# Altium PCB new - 备份_具有准确的打孔.PcbDoc
Units mil, origin at the board's own origin, x right, y up, seen from the top; angles counter-clockwise.
Board outline 4410 x 3685.04 mil, 2 copper layers (Top Layer, Bottom Layer); 82 components, 214 nets, 665 pads, 2 vias.
Unrouted connection lines stored in the file: 383.
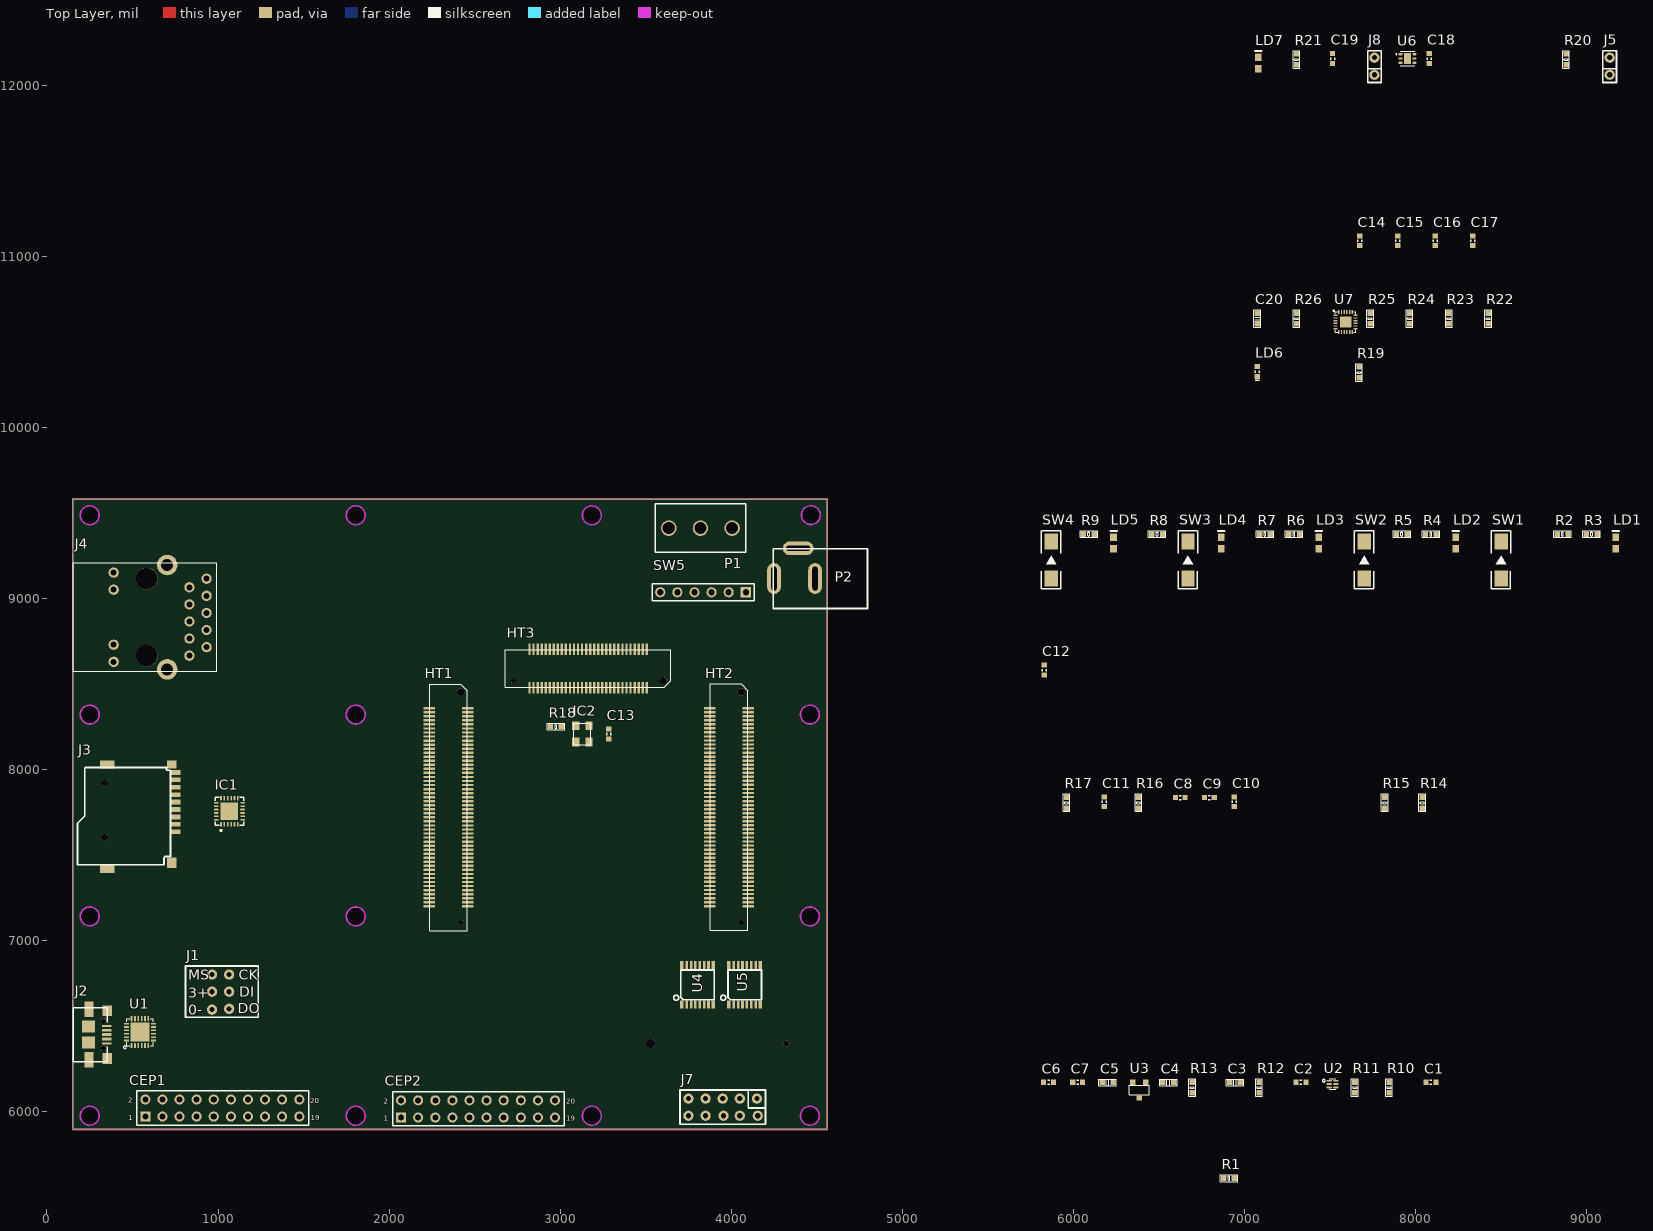
[diagram p0: Top Layer view]
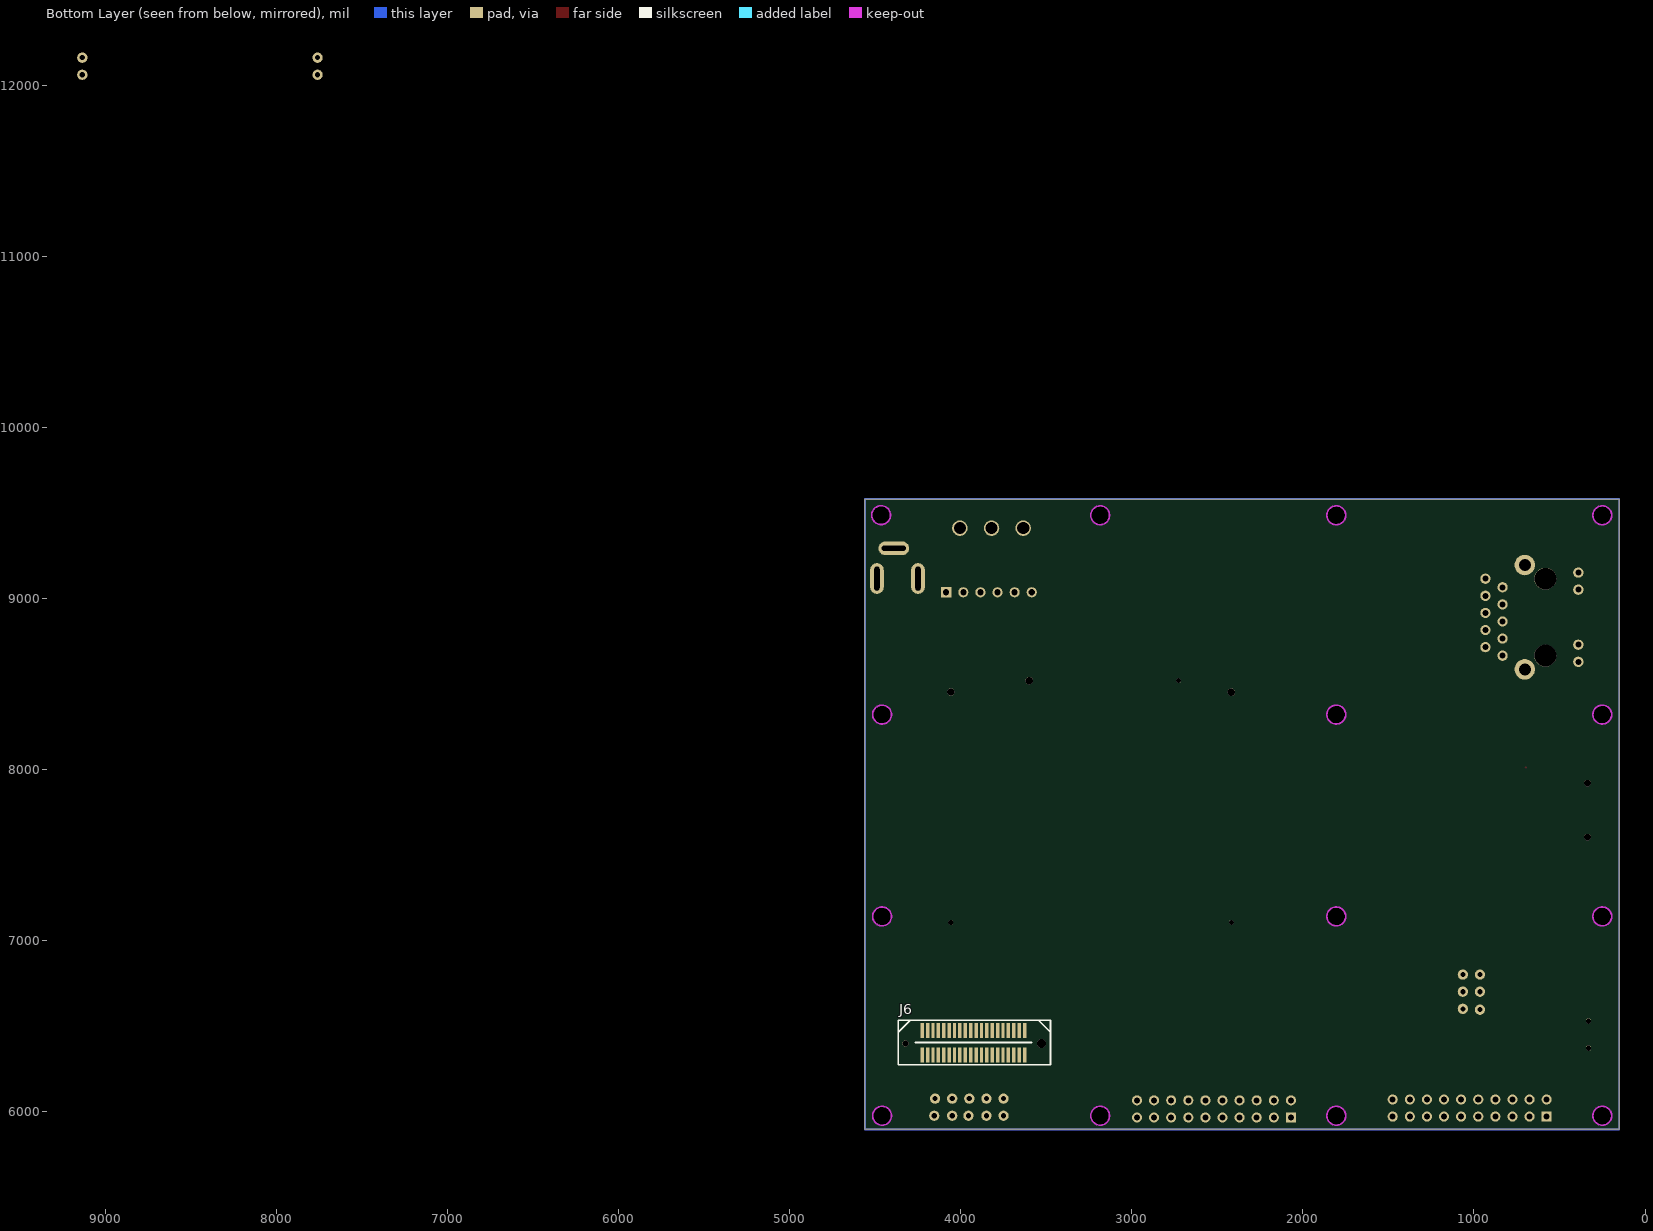
[diagram p1: Bottom Layer view, seen from below]

## Layer stack, top to bottom
Top Solder: solder mask 0.4, Solder Resist, Dk 3.5
Top Layer: signal copper 1.4
Dielectric 1: dielectric 12.6, FR-4, Dk 4.8
Bottom Layer: signal copper 1.4
Bottom Solder: solder mask 0.4, Solder Resist, Dk 3.5

## Board outline
150,5895 4560,5895 4560,9580.04 4559.45,9580 150,9580
cut-out: 1860.12,8320 cw(c1805,8320) 1805,8264.88 cw(c1805,8320) 1749.88,8320 cw(c1805,8320) 1805,8375.12 cw(c1805,8320)
cut-out: 1860.12,7140 cw(c1805,7140) 1805,7084.88 cw(c1805,7140) 1749.88,7140 cw(c1805,7140) 1805,7195.12 cw(c1805,7140)
cut-out: 305.12,9485 cw(c250,9485) 250,9429.88 cw(c250,9485) 194.88,9485 cw(c250,9485) 250,9540.12 cw(c250,9485)
cut-out: 305.12,5975 cw(c250,5975) 250,5919.88 cw(c250,5975) 194.88,5975 cw(c250,5975) 250,6030.12 cw(c250,5975)
cut-out: 305.12,7140 cw(c250,7140) 250,7084.88 cw(c250,7140) 194.88,7140 cw(c250,7140) 250,7195.12 cw(c250,7140)
cut-out: 305.12,8320 cw(c250,8320) 250,8264.88 cw(c250,8320) 194.88,8320 cw(c250,8320) 250,8375.12 cw(c250,8320)
cut-out: 1860.12,5975 cw(c1805,5975) 1805,5919.88 cw(c1805,5975) 1749.88,5975 cw(c1805,5975) 1805,6030.12 cw(c1805,5975)
cut-out: 1860.12,9485 cw(c1805,9485) 1805,9429.88 cw(c1805,9485) 1749.88,9485 cw(c1805,9485) 1805,9540.12 cw(c1805,9485)
cut-out: 3240.12,5975 cw(c3185,5975) 3185,5919.88 cw(c3185,5975) 3129.88,5975 cw(c3185,5975) 3185,6030.12 cw(c3185,5975)
cut-out: 3240.12,9485 cw(c3185,9485) 3185,9429.88 cw(c3185,9485) 3129.88,9485 cw(c3185,9485) 3185,9540.12 cw(c3185,9485)
cut-out: 4515.12,5975 cw(c4460,5975) 4460,5919.88 cw(c4460,5975) 4404.88,5975 cw(c4460,5975) 4460,6030.12 cw(c4460,5975)
cut-out: 4515.12,7140 cw(c4460,7140) 4460,7084.88 cw(c4460,7140) 4404.88,7140 cw(c4460,7140) 4460,7195.12 cw(c4460,7140)
cut-out: 4515.12,8320 cw(c4460,8320) 4460,8264.88 cw(c4460,8320) 4404.88,8320 cw(c4460,8320) 4460,8375.12 cw(c4460,8320)
cut-out: 4520.74,9485.83 cw(c4465.62,9485.83) 4465.62,9430.71 cw(c4465.62,9485.83) 4410.5,9485.83 cw(c4465.62,9485.83) 4465.62,9540.95 cw(c4465.62,9485.83)

## Design rules (kind name [scope] priority, off if disabled: settings)
Clearance [All] p1: gap=10 ignorepadtopadclearanceinfootprint=FALSE except(0: Arc-Hole Track-Hole SMDPad-Hole THPad-Hole Via-Hole Fill-Hole Poly-Hole Region-Hole Text-Hole)
DiffPairsRouting [All] p1: maxlimit=10 minlimit=10 mostfreqgap=10 toplayer_minwidth=15 toplayer_maxwidth=15 toplayer_prefwidth=15 bottomlayer_minwidth=15 bottomlayer_maxwidth=15 bottomlayer_prefwidth=15 maxuncoupledlength=500
PolygonConnect [All] p1: connectstyle=Relief reliefconductorwidth=10 reliefentries=4 polygonreliefangle="90 Angle" airgapwidth=10
RoutingVias [All] p1: holewidth=28 width=50 viastyle="Through Hole" minholewidth=28 minwidth=50 maxholewidth=28 maxwidth=50
SolderMaskExpansion [All] p1: expansion=4 istentingtop=FALSE
Width [All] p1: maxlimit=10 minlimit=10 preferedwidth=10
29 further rules are at their usual default settings.

## Classes and differential pairs
component class MPU9250: C20 R22 R23 R24 R25 R26 U7
component class Sheet2: C18 C19 J5 J6 J7 J8 LD7 R20 R21 U6
component class Sheet1: C14 C15 C16 C17 U4 U5
component class 15_PMU: LD6 P2 R19 SW5
component class 13_CEP: CEP1 CEP2
component class 12_PLCLK_100M: C13 IC2 R18
component class 11_BTN_LED_GPIO: LD1 LD2 LD3 LD4 LD5 P1 R2 R3 R4 R5 R6 R7 R8 R9 SW1 SW2 SW3 SW4
component class 07_PS_ETH_RJ45: C12 J4
component class 06_TF_CARD: C8 C9 C10 C11 IC1 J3 R14 R15 R16 R17
component class 05_USB_JTAG: J1
component class 03_UART_232: C1 C2 C3 C4 C5 C6 C7 J2 R10 R11 R12 R13 U1 U2 U3
component class 02_connector: HT1 HT2 HT3 R1
differential pair ETH-TD3: +ETH-TD3_P -ETH-TD3_N
differential pair ETH-TD2: +ETH-TD2_P -ETH-TD2_N
differential pair ETH-TD1: +ETH-TD1_P -ETH-TD1_N
differential pair ETH-TD0: +ETH-TD0_P -ETH-TD0_N
differential pair B35_L22: +B35_L22_P -B35_L22_N
differential pair B35_L20: +B35_L20_P -B35_L20_N
differential pair B35_L18: +B35_L18_P -B35_L18_N
differential pair B35_L17: +B35_L17_P -B35_L17_N
differential pair B35_L16: +B35_L16_P -B35_L16_N
differential pair B35_L15: +B35_L15_P -B35_L15_N
differential pair B35_L14: +B35_L14_P -B35_L14_N
differential pair B35_L11: +B35_L11_P -B35_L11_N
differential pair B35_L6: +B35_L6_P -B35_L6_N
differential pair B35_L5: +B35_L5_P -B35_L5_N
differential pair B35_L4: +B35_L4_P -B35_L4_N
differential pair B35_L3: +B35_L3_P -B35_L3_N
differential pair B35_L2: +B35_L2_P -B35_L2_N
differential pair B34_L24: +B34_L24_P -B34_L24_N
differential pair B34_L23: +B34_L23_P -B34_L23_N
differential pair B34_L22: +B34_L22_P -B34_L22_N
differential pair B34_L21: +B34_L21_P -B34_L21_N
differential pair B34_L20: +B34_L20_P -B34_L20_N
differential pair B34_L19: +B34_L19_P -B34_L19_N
differential pair B34_L18: +B34_L18_P -B34_L18_N
differential pair B34_L17: +B34_L17_P -B34_L17_N
differential pair B34_L16: +B34_L16_P -B34_L16_N
differential pair B34_L15: +B34_L15_P -B34_L15_N
differential pair B34_L14: +B34_L14_P -B34_L14_N
differential pair B34_L13: +B34_L13_P -B34_L13_N
differential pair B34_L12: +B34_L12_P -B34_L12_N
differential pair B34_L11: +B34_L11_P -B34_L11_N
differential pair B34_L10: +B34_L10_P -B34_L10_N
differential pair B34_L9: +B34_L9_P -B34_L9_N
differential pair B34_L8: +B34_L8_P -B34_L8_N
differential pair B34_L7: +B34_L7_P -B34_L7_N
differential pair B34_L6: +B34_L6_P -B34_L6_N
differential pair B34_L5: +B34_L5_P -B34_L5_N
differential pair B34_L4: +B34_L4_P -B34_L4_N
differential pair B34_L3: +B34_L3_P -B34_L3_N
differential pair B34_L2: +B34_L2_P -B34_L2_N

## Components (designator, comment, footprint, x,y, rotation, side; value= is the part's Value field where it differs from the comment)
C1 "10uf" CAP0603 8090,6170 r0 top
C2 "10uf" CAP0603 7330,6170 r0 top
C3 "100nF" C0603 6945,6170 r0 top
C4 "4.7uF" C0603 6555,6170 r0 top
C5 "100nF" C0603 6200,6170 r0 top
C6 "2.2uf" CAP0603 5855,6170 r0 top
C7 "10uf" CAP0603 6025,6170 r0 top
C8 "0.1uf" CAP0603 6625,7835 r0 top value=0.1uF
C9 "0.1uf" CAP0603 6795,7835 r0 top value=0.1uF
C10 "0.1uf" CAP0603 6940,7810 r90 top value=0.1uF
C11 "10uf/6V3" CAP0603 6180,7810 r90 top value=4.7uF
C12 "0.1uf" CAP0603 5830,8580 r90 top
C13 "0.1uf" CAP0603 3285,8206.46 r90 top value=10nF
C14 "1uf/6V3" CAP0603 7675,11090 r90 top value=4.7uF
C15 "1uf/6V3" CAP0603 7895,11090 r90 top value=4.7uF
C16 "1uf/6V3" CAP0603 8115,11090 r90 top value=4.7uF
C17 "1uf/6V3" CAP0603 8335,11090 r90 top value=4.7uF
C18 "1uf/6V3" CAP0603 8080,12155 r90 top value=4.7uF
C19 "1uf/6V3" CAP0603 7515,12155 r90 top value=4.7uF
C20 "100nF" C0603 7075,10635 r90 top
CEP1 "HEADER20" HEADER10X2X2.5 575,5970 r0 top
CEP2 "HEADER20" HEADER10X2X2.5 2070,5965 r0 top
HT1 "FX8-100S-SV" FX8-100S-SV92 2401.09,8326.14 r0 top
HT2 "FX8-100S-SV" FX8-100S-SV92 4041.49,8326.79 r0 top
HT3 "FX8-60S-SV" FX8-60S-SV92 3505.87,8701.58 r180 top
IC1 "TXS02612RTWR" QFN24 1066.77,7754.84 r90 top
IC2 "100MHZ" 3225 3129.37,8207.24 r90 top value=26MHz
J1 "JTAG" 2*3P 1115,6850 r270 top
J2 "Micro_USB2.0_DIP1" MicroUsb 245.8,6449.68 r0 top
J3 "SDK" TF_K 750,7635.16 r180 top
J4 "HY911130A" HY911130A 582.91,8889.17 r270 top
J5 "2P" 2P 9135,12060 r90 top
J6 "radar" BTB_40P_0.8_G 3970.43,6503.31 r180 bottom
J7 "ZERO_O" 2*5P 3750,6075 r0 top
J8 "2P" 2P 7760,12060 r90 top
LD1 "LED" 0603D 9170,9290 r90 top
LD2 "LED" 0603D 8235,9290 r90 top
LD3 "LED" 0603D 7435,9290 r90 top
LD4 "LED" 0603D 6865,9290 r90 top
LD5 "LED" 0603D 6235,9290 r90 top
LD6 "LED" D0603 7075,10325 r90 top value=RED
LD7 "LED" 0603D 7080,12095 r90 top
P1 "HEADER6" HEADER1X6 4085,9035 r180 top
P2 "DC" DC5.0 4415,9198 r0 top
R1 "0R" R0603 6910,5610 r0 top value=390
R2 "20k" R0603 8860,9375 r0 top
R3 "2.2k" R0603 9030,9375 r0 top
R4 "2.2k" R0603 8090,9375 r0 top
R5 "20k" R0603 7920,9375 r0 top
R6 "2.2k" R0603 7290,9375 r0 top
R7 "20k" R0603 7120,9375 r0 top
R8 "2.2k" R0603 6490,9375 r0 top
R9 "2.2k" R0603 6090,9375 r0 top
R10 "100R" R0603 7845,6140 r90 top
R11 "100R" R0603 7645,6140 r90 top
R12 "10K" R0603 7085,6140 r90 top
R13 "10K" R0603 6695,6140 r90 top
R14 "150R" R0603 8040,7805 r90 top value=150
R15 "49.9" R0603 7820,7805 r90 top
R16 "4.7K" R0603 6380,7805 r90 top
R17 "4.7K" R0603 5960,7805 r90 top
R18 "20R" R0603 2975,8250 r0 top
R19 "2K2" R0603 7670,10320 r90 top value=390
R20 "0R" R0603 8880,12150 r90 top value=390
R21 "4.7K" R0603 7305,12150 r90 top
R22 "10K" R0603 8425,10635 r90 top
R23 "10K" R0603 8195,10635 r90 top
R24 "10K" R0603 7965,10635 r90 top
R25 "10K" R0603 7735,10635 r90 top
R26 "10K" R0603 7305,10635 r90 top
SW1 "SW-1" SW-3X9 8500,9115 r90 top
SW2 "SW-1" SW-3X9 7700,9115 r90 top
SW3 "SW-1" SW-3X9 6670,9115 r90 top
SW4 "SW-1" SW-3X9 5870,9115 r90 top
SW5 "SW123" "SW1-2-3 -B" 3634.92,9410 r0 top
U1 "CP2104" QFN24_50P4X4X1 543.74,6464.21 r90 top
U2 "RCLAMP0522P" SLP1610P4_6 7515,6160 r0 top
U3 "XC6206P182MR" SOT23 6385,6125 r0 top
U4 "ADS7853IPWR" TSSOP16-0.65-5X4.4MM 3785,6740 r0 top
U5 "ADS7853IPWR" TSSOP16-0.65-5X4.4MM 4060,6740 r0 top
U6 "LP5912-3.3" WSON-6_L2.0-W2.0-P0.65-TL-EP -10040,25650 r0 top
U7 "MPU9250" MPU9250 7590,10615 r0 top

## Footprints (in the part's own frame and the unit in brackets; to place one, negate y for a bottom-side part, rotate by r counter-clockwise, add the part's x,y. Pads: shape width x height; smd on the part's side, far side on the other; paste and mask are expansions set on the pad)
2*3P [mil]
  round 60 hole 30: 1(50,-50) 2(50,-150) 3(150,-50) 4(150,-150) 5(250,-50) 6(255,-150)
  silkscreen extent 0,-305 300,120
2*5P [mil]
  round 60 hole 30: 1(0,0) 2(0,-100) 3(100,0) 4(100,-100) 5(200,0) 6(205,-100) 7(300,0) 8(300,-100) 9(400,0) 10(405,-100)
  silkscreen extent -50,-150 450,50
2P [mil]
  round 60 hole 30: 1(0,0) 2(100,0)
  silkscreen extent -45,-40 140,40
0603D [mm]
  rect 1.1x1 smd: 1(0,0) 2(1.7,0)
  silkscreen extent 2.63,-0.51 2.63,0.51, body extent -0.64,-0.58 2.34,0.58, height 0.76
3225 [mm]
  rect 1.3x1.1 smd: 1(-1.2,-1) 2(1.2,-1) 3(1.2,1) 4(-1.2,1)
  silkscreen extent -1.6,-1.25 1.6,1.25
BTB_40P_0.8_G [mm]
  rect 0.5x2.22 smd: 1(-6.477,-0.762) 2(-5.677,-0.762) 3(-4.877,-0.762) 4(-4.077,-0.762) 5(-3.277,-0.762) 6(-2.477,-0.762) 7(-1.677,-0.762) 8(-0.877,-0.762) 9(-0.077,-0.762) 10(0.723,-0.762) 11(1.523,-0.762) 12(2.323,-0.762) 13(3.123,-0.762) 14(3.923,-0.762) 15(4.723,-0.762) 16(5.523,-0.762) 17(6.323,-0.762) 18(7.123,-0.762) 19(7.923,-0.762) 20(8.723,-0.762) 21(8.723,-4.402) 22(7.923,-4.402) 23(7.123,-4.402) 24(6.323,-4.402) 25(5.523,-4.402) 26(4.723,-4.402) 27(3.923,-4.402) 28(3.123,-4.402) 29(2.323,-4.402) 30(1.523,-4.402) 31(0.723,-4.402) 32(-0.077,-4.402) 33(-0.877,-4.402) 34(-1.677,-4.402) 35(-2.477,-4.402) 36(-3.277,-4.402) 37(-4.077,-4.402) 38(-4.877,-4.402) 39(-5.677,-4.402) 40(-6.477,-4.402)
  round 0.9 hole 0.9 unplated: ""(-8.976,-2.692)
  round 1.3 hole 1.3 unplated: ""(11.222,-2.692)
  silkscreen extent -10.03,-5.84 12.57,0.76
C0603 [mm]
  rect 0.8x0.8 smd: 1(-0.8,0) 2(0.8,0)
  silkscreen extent -1.3,-0.5 1.3,0.5, body extent -1.3,-0.5 1.3,0.5, height 3.81
CAP0603 [mm]
  rect 0.75x0.8 smd: 1(-0.725,0) 2(0.725,0)
  silkscreen extent -0.15,-0.3 0.15,0.3, body extent -0.86,-0.46 0.86,0.46, height 0.92
D0603 [mm]
  rect 0.75x0.8 smd: A(0.725,0) K(-0.725,0)
  silkscreen extent -1.3,-0.3 0.15,0.3, body extent -0.86,-0.46 0.86,0.46, height 0.92
DC5.0 [mil]
  oval 80x180 hole 30 slot 140 at 90 deg: 1(-165.16,-83) 2(75,-83)
  oval 180x80 hole 30 slot 140 at 0 deg: 2(-23.43,94)
  silkscreen extent -170,-258 381,92
FX8-60S-SV92 [mm]
  rect 0.35x1.7 smd: A1(0,0) A2(0.6,0) A3(1.2,0) A4(1.8,0) A5(2.4,0) A6(3,0) A7(3.6,0) A8(4.2,0) A9(4.8,0) A10(5.4,0) A11(6,0) A12(6.6,0) A13(7.2,0) A14(7.8,0) A15(8.4,0) A16(9,0) A17(9.6,0) A18(10.2,0) A19(10.8,0) A20(11.4,0) A21(12,0) A22(12.6,0) A23(13.2,0) A24(13.8,0) A25(14.4,0) A26(15,0) A27(15.6,0) A28(16.2,0) A29(16.8,0) A30(17.4,0) B1(0,5.7) B2(0.6,5.7) B3(1.2,5.7) B4(1.8,5.7) B5(2.4,5.7) B6(3,5.7) B7(3.6,5.7) B8(4.2,5.7) B9(4.8,5.7) B10(5.4,5.7) B11(6,5.7) B12(6.6,5.7) B13(7.2,5.7) B14(7.8,5.7) B15(8.4,5.7) B16(9,5.7) B17(9.6,5.7) B18(10.2,5.7) B19(10.8,5.7) B20(11.4,5.7) B21(12,5.7) B22(12.6,5.7) B23(13.2,5.7) B24(13.8,5.7) B25(14.4,5.7) B26(15,5.7) B27(15.6,5.7) B28(16.2,5.7) B29(16.8,5.7) B30(17.4,5.7)
  round 1.092 hole 1.1: C1(-2.4,4.65)
  round 0.711 hole 0.75: C2(19.8,4.65)
  silkscreen extent -3.6,0.05 21.01,5.65, body extent -3.66,-0.87 21,6.63, height 3.81
FX8-100S-SV92 [mm]
  rect 1.7x0.35 smd: A1(-4.221,0.782) A2(-4.221,0.182) A3(-4.221,-0.418) A4(-4.221,-1.018) A5(-4.221,-1.618) A6(-4.221,-2.218) A7(-4.221,-2.818) A8(-4.221,-3.418) A9(-4.221,-4.018) A10(-4.221,-4.618) A11(-4.221,-5.218) A12(-4.221,-5.818) A13(-4.221,-6.418) A14(-4.221,-7.018) A15(-4.221,-7.618) A16(-4.221,-8.218) A17(-4.221,-8.818) A18(-4.221,-9.418) A19(-4.221,-10.018) A20(-4.221,-10.618) A21(-4.221,-11.218) A22(-4.221,-11.818) A23(-4.221,-12.418) A24(-4.221,-13.018) A25(-4.221,-13.618) A26(-4.221,-14.218) A27(-4.221,-14.818) A28(-4.221,-15.418) A29(-4.221,-16.018) A30(-4.221,-16.618) A31(-4.221,-17.218) A32(-4.221,-17.818) A33(-4.221,-18.418) A34(-4.221,-19.018) A35(-4.221,-19.618) A36(-4.221,-20.218) A37(-4.221,-20.818) A38(-4.221,-21.418) A39(-4.221,-22.018) A40(-4.221,-22.618) A41(-4.221,-23.218) A42(-4.221,-23.818) A43(-4.221,-24.418) A44(-4.221,-25.018) A45(-4.221,-25.618) A46(-4.221,-26.218) A47(-4.221,-26.818) A48(-4.221,-27.418) A49(-4.221,-28.018) A50(-4.221,-28.618) B1(1.479,0.782) B2(1.479,0.182) B3(1.479,-0.418) B4(1.479,-1.018) B5(1.479,-1.618) B6(1.479,-2.218) B7(1.479,-2.818) B8(1.479,-3.418) B9(1.479,-4.018) B10(1.479,-4.618) B11(1.479,-5.218) B12(1.479,-5.818) B13(1.479,-6.418) B14(1.479,-7.018) B15(1.479,-7.618) B16(1.479,-8.218) B17(1.479,-8.818) B18(1.479,-9.418) B19(1.479,-10.018) B20(1.479,-10.618) B21(1.479,-11.218) B22(1.479,-11.818) B23(1.479,-12.418) B24(1.479,-13.018) B25(1.479,-13.618) B26(1.479,-14.218) B27(1.479,-14.818) B28(1.479,-15.418) B29(1.479,-16.018) B30(1.479,-16.618) B31(1.479,-17.218) B32(1.479,-17.818) B33(1.479,-18.418) B34(1.479,-19.018) B35(1.479,-19.618) B36(1.479,-20.218) B37(1.479,-20.818) B38(1.479,-21.418) B39(1.479,-22.018) B40(1.479,-22.618) B41(1.479,-23.218) B42(1.479,-23.818) B43(1.479,-24.418) B44(1.479,-25.018) B45(1.479,-25.618) B46(1.479,-26.218) B47(1.479,-26.818) B48(1.479,-27.418) B49(1.479,-28.018) B50(1.479,-28.618)
  round 1.092 hole 1.1: C1(0.429,3.182)
  round 0.711 hole 0.75: C2(0.429,-31.018)
  silkscreen extent -4.17,-32.22 1.43,4.38, body extent -5.12,-32.32 2.38,4.48, height 3.81
HEADER1X6 [mm]
  rect 1.5x1.5 hole 0.9: 1(0,0)
  round 1.5 hole 0.9: 2(2.54,0) 3(5.08,0) 4(7.62,0) 5(10.16,0) 6(12.7,0)
  silkscreen extent -1.27,-1.27 13.92,1.27
HEADER10X2X2.5 [mm]
  rect 1.5x1.5 hole 0.9: 1(0,0)
  round 1.5 hole 0.9: 2(0,2.54) 3(2.54,0) 4(2.54,2.54) 5(5.08,0) 6(5.08,2.54) 7(7.62,0) 8(7.62,2.54) 9(10.16,0) 10(10.16,2.54) 11(12.7,0) 12(12.7,2.54) 13(15.24,0) 14(15.24,2.54) 15(17.78,0) 16(17.78,2.54) 17(20.32,0) 18(20.32,2.54) 19(22.86,0) 20(22.86,2.54)
  silkscreen extent -1.27,-1.27 24.25,3.81
HY911130A [mil]
  round 60 hole 35: 1(-225,350) 2(-175,250) 3(-125,350) 4(-75,250) 5(-25,350) 6(25,250) 7(75,350) 8(125,250) 9(175,350) 10(225,250) 11(-260.83,-192.91) 12(-160.83,-192.91) 13(160.83,-192.91) 14(260.83,-192.91)
  round 120 hole 70: 15(-304.92,120.08) 16(304.92,120.08)
  round 128 hole 128: " "(-225,0) " "(225,0)
  silkscreen extent -317,-430 317,409, body extent -317,-430 317,409, height 150
MicroUsb [mm]
  round 0.8 hole 0.8: 0(2.144,-2.032) 0(2.15,2)
  rect 1.4x0.305 smd: 1(2.647,1.293) 5(2.647,-1.307)
  rect 1.4x0.4 smd: 2(2.647,0.643) 3(2.647,-0.007) 4(2.647,-0.657)
  rect 1.4x1.6 smd: M1(2.697,3.531) M2(2.697,-3.556)
  rect 1.3x2.3 smd: S1(-0.003,3.743) S4(-0.003,-3.757)
  rect 1.9x1.8 smd: S2(-0.092,1.168) S3(-0.092,-1.168)
  silkscreen extent -2.3,-4.01 2.7,3.99, body extent -2.37,-3.74 2.63,4.26, height 2
MPU9250 [mm]
  rect 0.6x0.2 smd: 1(-1.472,1) 2(-1.472,0.6) 3(-1.472,0.2) 4(-1.472,-0.2) 5(-1.472,-0.6) 6(-1.472,-1) 13(1.528,-1) 14(1.528,-0.6) 15(1.528,-0.2) 16(1.528,0.2) 17(1.528,0.6) 18(1.528,1)
  rect 0.2x0.6 smd: 7(-0.972,-1.5) 8(-0.572,-1.5) 9(-0.172,-1.5) 10(0.228,-1.5) 11(0.628,-1.5) 12(1.028,-1.5) 19(1.028,1.5) 20(0.628,1.5) 21(0.228,1.5) 22(-0.172,1.5) 23(-0.572,1.5) 24(-0.972,1.5)
  rect 1.7x1.7 smd: 25(0.026,-0.003)
  silkscreen extent -1.83,-1.5 1.53,1.76
QFN24 [mm]
  oval 0.7x0.25 smd: 1(-1.95,1.25) 2(-1.95,0.75) 3(-1.95,0.25) 4(-1.95,-0.25) 5(-1.95,-0.75) 6(-1.95,-1.25) 13(1.95,-1.25) 14(1.95,-0.75) 15(1.95,-0.25) 16(1.95,0.25) 17(1.95,0.75) 18(1.95,1.25)
  oval 0.25x0.7 smd: 7(-1.25,-1.95) 8(-0.75,-1.95) 9(-0.25,-1.95) 10(0.25,-1.95) 11(0.75,-1.95) 12(1.25,-1.95) 19(1.25,1.95) 20(0.75,1.95) 21(0.25,1.95) 22(-0.25,1.95) 23(-0.75,1.95) 24(-1.25,1.95)
  rect 2.6x2.6 smd: P(0,0)
  silkscreen extent -2.97,-2.1 2.1,2.1, body extent -2.08,-2.07 2.07,2.08, height 0.8
QFN24_50P4X4X1 [mm] "QFN24_50P4X4X1"
  oval 0.8x0.25 smd: 1(-2,1.25) 2(-2,0.75) 3(-2,0.25) 4(-2,-0.25) 5(-2,-0.75) 6(-2,-1.25) 13(2,-1.25) 14(2,-0.75) 15(2,-0.25) 16(2,0.25) 17(2,0.75) 18(2,1.25)
  oval 0.25x0.8 smd: 7(-1.25,-2) 8(-0.75,-2) 9(-0.25,-2) 10(0.25,-2) 11(0.75,-2) 12(1.25,-2) 19(1.25,2) 20(0.75,2) 21(0.25,2) 22(-0.25,2) 23(-0.75,2) 24(-1.25,2)
  rect 2.8x2.8 smd: 25(0,0)
  silkscreen extent -2.45,-2 2,2.45, body extent -2.5,-2.5 2.5,2.5, height 3.81
R0603 [mm] "R0603"
  rect 0.8x0.8 smd: 1(-0.8,0) 2(0.8,0)
  silkscreen extent -1.3,-0.5 1.3,0.5, body extent -1.3,-0.5 1.3,0.5, height 3.81
SLP1610P4_6 [mm]
  oval 0.8x0.25 smd: 1(-0.5,0.5) 2(-0.5,0) 3(-0.5,-0.5) 4(0.5,-0.5) 5(0.5,0) 6(0.5,0.5)
  silkscreen extent -1.5,-0.8 0.5,0.8, body extent -1,-0.8 1,0.8, height 3.81
SOT23 [mm]
  rect 0.8x0.8 smd: 1(0.95,1.175) 2(-0.95,1.175) 3(0,-1.175)
  silkscreen extent -1.5,-0.7 1.5,0.7, body extent -1.7,-1.78 1.7,1.78, height 3.81
"SW1-2-3 -B" [mm]
  round 2.3 hole 1.8: 1(0,0) 2(4.7,0) 3(9.4,0)
  silkscreen extent -2,-3.6 11.4,3.6, body extent -1.7,-3.3 11.1,3.3, height 11
SW-3X9 [mm]
  rect 2.4x2 smd: 1(0,0) 2(5.5,0)
  silkscreen extent -1.52,-1.42 7.11,1.47, body extent -1.42,-1.3 6.93,1.35, height 1.78
TF_K [mm]
  rect 2.2x1.2 smd: 0(10.1,-10) 11(10.1,5.5)
  rect 1.6x0.7 smd: 1(0,0) 2(0,-1.1) 3(0,-2.2) 4(0,-3.3) 5(0,-4.4) 6(0,-5.5) 7(0,-6.6) 8(0,-7.7) 9(0,-8.8)
  rect 1.4x1.2 smd: 10(0.5,-10)
  rect 1.4x1.6 smd: 12(0.5,4.6)
  Top Layer lines w0.254: 1.362,-9.543 1.312,-9.594
  silkscreen extent 0.7,-9.59 14.52,4.9
TSSOP16-0.65-5X4.4MM [mil]
  rect 19.7x47.2 smd: 1(-73.5,-115) 8(110.5,-115) 9(110.5,115) 16(-73.5,115)
  rect 15.7x47.2 smd: 2(-45.5,-115) 3(-19.5,-115) 4(5.5,-115) 5(31.5,-115) 6(56.5,-115) 7(82.5,-115) 10(82.5,115) 11(56.5,115) 12(31.5,115) 13(5.5,115) 14(-19.5,115) 15(-45.5,115)
  silkscreen extent -121,-90 116,87
WSON-6_L2.0-W2.0-P0.65-TL-EP [mm]
  oval 0.607x0.364 smd: 1(455.984,-342.12) 2(455.984,-342.77) 3(455.984,-343.42) 4(458.041,-343.42) 5(458.041,-342.77) 6(458.041,-342.12)
  rect 1x1.6 smd: 7(457.013,-342.77)
  silkscreen extent 455.31,-343.85 458.09,-341.69

## Part data
C1 C2 C6 C7 C8 C9 C10 C11 C12 C13: library part CAPACITOR, "Generic Capacitor"
C3 C4 C5 C20: library part CAP1, CURRENT=CIMAX, MAX_TEMP=CTMAX, PSpiceTemplate="C^@REFDES %1 %2 ?TOLERANCE|C^@REFDES| @VALUE ?IC/IC=@IC/ TC=@TC1,@TC2 ?TOLERANCE|\n.model C^@REFDES CAP C=1 DEV=@TOLERANCE% TC1=@TC1 TC2=@TC2 VC1=@VC1 VC2=@VC2|", VOLTAGE=CMAX, DIST=FLAT, KNEE=CBMAX, SLOPE=CSMAX, TC1=0, TC2=0, VC1=0, VC2=0
C14 C15 C16 C17 C18 C19: library part CAPACITOR_1UF, "Generic Capacitor"
CEP1 CEP2: library part HEADER10X2
HT1 HT2: library part FX8-100P-SV92
HT3: library part FX8-60P-SV92
IC1: library part TXS02612, "SDIO Port Expander with Voltage-Level Translation", Manufacturer="Texas Instruments"
IC2: library part FXO-HC5, "3.3V HCMOS Oscillator", Manufacturer="Fox Electronics"
J2: library part Micro_USB2_0.0_DIP1
J3: library part SD
LD1 LD2 LD3 LD4 LD5 LD7: library part LEDR
LD6: "Generic LED"
R1 R14 R16 R17 R19 R20 R21: library part RESISTOR, "Generic Resistor"
R2 R3 R4 R5 R6 R7 R8 R9 R18: library part Res, "1K"
R10 R11 R12 R13 R22 R23 R24 R25 R26: library part RES1, MAX_TEMP=RTMAX, POWER=RMAX, PSpiceTemplate="R^@REFDES %1 %2 ?TOLERANCE|R^@REFDES| @VALUE TC=@TC1,@TC2 ?TOLERANCE|\n.model R^@REFDES RES R=1 DEV=@TOLERANCE% TC1=@TC1 TC2=@TC2|", VOLTAGE=RVMAX, DIST=FLAT, SLOPE=RSMAX, TC1=0, TC2=0
R15: library part RESISTOR, "Resistor", LoadStatus=Load
SW1 SW2 SW3 SW4: "SW"
U3: library part XC6206P332MR

## Via types
v1: diameter 39.37, hole 39.37, Top Layer to Bottom Layer, 2 vias

## Nets (pads, with @x,y where several pads share a name; then routed paths per layer and width w, separated by ;. In a path a pad name is that pad's centre, name@x,y a point inside that pad or via, vN(x,y) a via of type N, cw(c..) or ccw(c..) an arc to the next point about the centre after c; other vN are vias at no path point)
5V_IN: C18.2 HT1.A49 HT1.A50 HT1.B49 HT1.B50 HT2.A49 HT2.A50 HT2.B49 HT2.B50 R19.1 SW5.2 U6.4 U6.6
ADC_3.3V: C14.1 C15.1 C16.1 C17.1 C19.1 R20.1 R21.2 R22.2 R23.2 R24.2 U4.3 U4.6 U4.9 U4.16 U5.3 U5.6 U5.9 U5.16 U6.1 U7.1 U7.8 U7.13
B20: HT3.A24 J6.26
B34_L1_N: HT2.A27
B34_L1_P: HT2.A28
B34_L2_N: HT2.B23
B34_L2_P: HT2.B24
B34_L3_N: HT2.A23
B34_L3_P: HT2.A24
B34_L4_N: HT2.B27
B34_L4_P: HT2.B28
B34_L5_N: HT2.A21
B34_L5_P: HT2.A22
B34_L6_N: HT2.A25
B34_L6_P: HT2.A26
B34_L7_N: HT2.B7 R26.1 U7.11
B34_L7_P: HT2.B8 R25.1 U7.9
B34_L8_N: HT2.B25
B34_L8_P: HT2.B26
B34_L9_N: HT2.B16
B34_L9_P: HT2.B17
B34_L10_N: HT2.B21
B34_L10_P: HT2.B22
B34_L11_N: HT2.B14
B34_L11_P: HT2.B15
B34_L12_N: HT2.A12
B34_L12_P: HT2.A13
B34_L13_N: HT2.A9
B34_L13_P: HT2.A10
B34_L14_N: HT2.A5
B34_L14_P: HT2.A6
B34_L15_N: HT2.A3
B34_L15_P: HT2.A4
B34_L16_N: HT2.B3 R24.1 U7.23
B34_L16_P: HT2.B4 R23.1 U7.24
B34_L17_N: HT2.B5 U7.12
B34_L17_P: HT2.B6 R22.1 U7.22
B34_L18_N: HT2.B18
B34_L18_P: HT2.B19
B34_L19_N: HT2.A16
B34_L19_P: HT2.A17
B34_L20_N: HT2.A14
B34_L20_P: HT2.A15
B34_L21_N: HT2.B12
B34_L21_P: HT2.B13
B34_L22_N: HT2.B9
B34_L22_P: HT2.B10
B34_L23_N: HT2.A7
B34_L23_P: HT2.A8
B34_L24_N: HT2.A18
B34_L24_P: HT2.A19
B35_G14: HT3.A2
B35_J15: HT3.A3
B35_L1_P: HT3.A25 J6.28
B35_L2_N: HT3.A29
B35_L2_P: HT3.A30
B35_L3_N: HT3.B29
B35_L3_P: HT3.B30
B35_L4_N: HT3.A22 J6.32
B35_L4_P: HT3.A23 J6.30
B35_L5_N: HT3.A26
B35_L5_P: HT3.A27
B35_L6_N: HT3.B26
B35_L6_P: HT3.B27
B35_L11_N: HT3.B15
B35_L11_P: HT3.B16
B35_L13_P: HT3.B23 R18.1
B35_L14_N: HT3.A13 U4.13
B35_L14_P: HT3.A14 U4.14
B35_L15_N: HT3.A20 J6.38
B35_L15_P: HT3.A21 J6.36
B35_L16_N: HT3.A17 U4.11
B35_L16_P: HT3.A18 U5.11
B35_L17_N: HT3.A8
B35_L17_P: HT3.A9
B35_L18_N: HT3.A15 U5.13
B35_L18_P: HT3.A16 U5.14
B35_L20_N: HT3.B11 P1.5
B35_L20_P: HT3.B12 P1.6
B35_L22_N: HT3.B8 P1.3
B35_L22_P: HT3.B9 P1.4
BTN0: HT1.B3 R2.1 SW1.1
BTN1: HT2.A1 R5.1 SW2.1
BTN2: HT2.B1 R7.1 SW3.1
CLK1: HT3.B22 U4.12
CLK2: HT3.B14 U5.12
CON1: CEP1.18 HT2.B30
CON2: CEP1.16 HT2.B31
CON3: CEP1.14 HT2.B32
CON4: CEP1.12 HT2.B33
CON5: CEP1.10 HT2.B34
CON6: CEP1.8 HT2.B35
CON7: CEP1.6 HT2.B36
CON8: CEP1.4 HT2.B37
CON9: CEP1.2 HT2.B39
CON10: CEP1.17 HT2.B40
CON11: CEP1.15 HT2.B41
CON12: CEP1.13 HT2.B42
CON13: CEP1.11 HT2.A30
CON14: CEP1.9 HT2.A31
CON15: CEP1.7 HT2.A32
CON16: CEP1.5 HT2.A33
CON17: CEP1.3 HT2.A34
CON18: CEP1.1 HT2.A35
CON19: CEP2.18 HT2.A36
CON20: CEP2.16 HT2.A37
CON21: CEP2.14 HT2.A39
CON22: CEP2.12 HT2.A40
CON23: CEP2.10 HT2.A41
CON24: CEP2.8 HT2.A42
CON25: CEP2.6 HT2.A43
CON26: CEP2.4 HT3.B4
CON27: CEP2.2 HT3.B5
CON28: CEP2.17 HT3.B6
CON29: CEP2.15 HT3.B7
CON30: CEP2.13 HT3.A4
CON31: CEP2.11 HT3.A5
CON32: CEP2.9 HT3.A6
CON33: CEP2.7 HT3.A7
CON34: CEP2.5 HT3.A11
CON35: CEP2.3 HT3.A12
CON36: CEP2.1 HT3.B13
DAT1: HT3.B17 U4.10
DAT2: HT3.B18 U5.10
DC5V_IN: P2.1 SW5.3
ETH-TD0_N: HT1.A7 J4.3
ETH-TD0_P: HT1.A6 J4.2
ETH-TD1_N: HT1.A9 J4.7
ETH-TD1_P: HT1.A8 J4.4
ETH-TD2_N: HT1.A14 J4.6
ETH-TD2_P: HT1.A13 J4.5
ETH-TD3_N: HT1.A16 J4.9
ETH-TD3_P: HT1.A15 J4.8
ETH_AVDD3V3: HT1.A10
ETH_LDA: HT1.B8 J4.14
ETH_LDB: HT1.B9 J4.12
GND: C1.1 C2.2 C3.1 C4.1 C5.1 C6.1 C7.1 C8.2 C9.2 C10.2 C11.2 C12.1 C13.2 C14.2 C15.2 C16.2 C17.2 C18.1 C19.2 C20.1 CEP1.19 CEP2.19 HT1.A4 HT1.A5 HT1.A12 HT1.A17 HT1.A22 HT1.A23 HT1.A32 HT1.A33 HT1.A38 HT1.A39 HT1.A47 HT1.A48 HT1.B6 HT1.B7 HT1.B10 HT1.B11 HT1.B12 HT1.B13 HT1.B14 HT1.B15 HT1.B16 HT1.B17 HT1.B18 HT1.B19 HT1.B20 HT1.B28 HT1.B34 HT1.B35 HT1.B39 HT1.B40 HT1.B41 HT1.B42 HT1.B43 HT1.B44 HT1.B45 HT1.B46 HT1.B47 HT1.B48 HT2.A2 HT2.A11 HT2.A20 HT2.A29 HT2.A38 HT2.A47 HT2.A48 HT2.B2 HT2.B11 HT2.B20 HT2.B29 HT2.B38 HT2.B47 HT2.B48 HT3.A1 HT3.A10 HT3.A19 HT3.A28 HT3.B1 HT3.B10 HT3.B19 HT3.B28 IC1.2 IC1.11 IC1.P IC2.2 J1.6 J2.5 J3.0 J3.6 J3.10 J3.11 J3.12 J4.10 J4.13 J4.15 J4.16 J5.1 J6.1 J6.3 J6.4 J6.5 J6.7 J6.8 J6.9 J6.11 J6.12 J6.13 J6.15 J6.16 J6.17 J6.18 J6.19 J6.20 J6.23 J6.25 J6.27 J6.29 J6.31 J6.33 J6.35 J6.37 J6.39 J6.40 J7.9 LD1.2 LD2.2 LD3.2 LD4.2 LD5.2 LD6.K LD7.2 P1.2 P2.2 R1.1 R13.2 R17.1 R25.2 R26.2 SW1.2 SW2.2 SW3.2 SW4.2 U1.2 U1.25 U2.3 U2.4 U3.1 U4.2 U4.4 U4.5 U4.7 U4.15 U5.2 U5.4 U5.5 U5.7 U5.15 U6.5 U7.18 U7.20 U7.25
IFI1: J6.10 J7.2
IFI2: J6.6 J7.6
IFQ1: J6.14 J7.4
IFQ2: J6.2 J7.8
LED1: HT3.B25 R3.2
LED2: HT3.B24 R4.2
LED3: HT3.B21 R6.2
LED4: HT3.B20 R8.2
LED5: HT1.B2 R9.2
NetC4_2: C4.2 U1.16
NetC12_2: C12.2 J4.1
NetC20_2: C20.2 U7.10
NetIC1_24: IC1.24 R17.2
NetIC2_3: IC2.3 R18.2
NetLD1_1: LD1.1 R3.1
NetLD2_1: LD2.1 R4.1
NetLD3_1: LD3.1 R6.1
NetLD4_1: LD4.1 R8.1
NetLD5_1: LD5.1 R9.1
NetLD6_A: LD6.A R19.2
NetLD7_1: LD7.1 R21.1 U6.3
NetR10_1: R10.1 U1.21
NetR11_1: R11.1 U1.20
NetR12_1: R12.1 U1.9
NetR13_1: R13.1 U1.15
OTG_D+: HT1.A18
OTG_D-: HT1.A19
OTG_ID: HT1.A20
PS_RST: HT1.B37 SW4.1
R_ANA: J6.34 J8.2
R_VT: J6.24 J8.1
RAD_VCC: J5.2 J6.21 J6.22 J7.10 R20.2
RIN1: J7.1 U4.1
RIN2: J7.3 U4.8
RIN3: J7.5 U5.1
RIN4: J7.7 U5.8
SD1_CD: HT1.A40
SD1_CLK: HT1.A41
SD1_CMD: HT1.A42
SD1_D0: HT1.A44
SD1_D1: HT1.A45
SD1_D2: HT1.A46
SD1_D3: HT1.A43
SD_CCLK: HT1.A26 R15.2
SD_CCLK_R: IC1.9 R15.1
SD_CD: HT1.A27 R14.1
SD_CD_L: J3.9 R14.2
SD_CMD: HT1.A24 IC1.4
SD_D0: HT1.A30 IC1.6
SD_D1: HT1.A29 IC1.7
SD_D2: HT1.A28 IC1.1
SD_D3: HT1.A25 IC1.3
TCK-JTAG: HT1.A36 J1.1
TDI-JTAG: HT1.A34 J1.3
TDO-JTAG: HT1.A35 J1.5
TF_CLK: IC1.19 J3.5
TF_CMD: IC1.20 J3.3 R16.1
TF_DAT0: IC1.18 J3.7
TF_DAT1: IC1.16 J3.8
TF_DAT2: IC1.23 J3.1
TF_DAT3: IC1.22 J3.2
TMS-JTAG: HT1.A37 J1.2
UART-D+: HT1.A3
UART-D-: HT1.A2
UART_RXD: HT1.B4 R11.2
UART_TXD: HT1.B5 R10.2
USB5V0: HT1.A21 HT1.B21
USB_1V8: C5.2 C7.2 U1.5 U3.2
USB_5V: HT1.B1
USB_5VIN: C1.2 C2.1 C6.2 J2.1 U1.7 U1.8 U3.3
USB_UART_D+: J2.3 U1.3 U2.2 U2.5
USB_UART_D-: J2.2 U1.4 U2.1 U2.6
VBAT: HT1.A1 R1.2
VCC1V8: C8.1 HT1.B24 HT1.B25 HT1.B26 IC1.5
VCC3V3: C9.1 C10.1 C11.1 C13.1 CEP1.20 CEP2.20 HT1.B30 HT1.B31 HT1.B32 IC1.17 IC1.21 IC2.4 J1.4 J3.4 J4.11 P1.1 R2.2 R16.2
VCC_ADJ: HT2.B43 HT2.B44 HT2.B45 R5.2 R7.2
VDD: C3.2 R12.2 U1.6
pads on no net: "J4. " HT1.A11 HT1.A31 HT1.B22 HT1.B23 HT1.B27 HT1.B29 HT1.B33 HT1.B36 HT1.B38 HT1.C1 HT1.C2 HT2.A44 HT2.A45 HT2.A46 HT2.B46 HT2.C1 HT2.C2 HT3.B2 HT3.B3 HT3.C1 HT3.C2 IC1.8 IC1.10 IC1.12 IC1.13 IC1.14 IC1.15 IC2.1 J2.0 J2.4 J2.M1 J2.M2 J2.S1 J2.S2 J2.S3 J2.S4 J6. SW5.1 U1.1 U1.10 U1.11 U1.12 U1.13 U1.14 U1.17 U1.18 U1.19 U1.22 U1.23 U1.24 U6.2 U6.7 U7.2 U7.3 U7.4 U7.5 U7.6 U7.7 U7.14 U7.15 U7.16 U7.17 U7.19 U7.21
copper on no net:
  other v1: 336.61,7603.66 336.61,7918.62

## Keep-outs
Keep-Out Layer:
  circle w10: c1805,8320 r55.12
  circle w10: c1805,7140 r55.12
  circle w10: c250,9485 r55.12
  circle w10: c250,5975 r55.12
  circle w10: c250,7140 r55.12
  circle w10: c250,8320 r55.12
  circle w10: c1805,5975 r55.12
  circle w10: c1805,9485 r55.12
  circle w10: c3185,5975 r55.12
  circle w10: c3185,9485 r55.12
  circle w10: c4460,5975 r55.12
  circle w10: c4460,7140 r55.12
  circle w10: c4460,8320 r55.12
  circle w10: c4465.62,9485.83 r55.12

## Other copper
Multi-Layer:
  lines w10: 150,5895 150,9580.04 ; 150.55,5895 4560,5895 4560,9580.04 ; 150.55,9580 4560,9580

## Text inside footprints (layer, text, board x,y; h text height)
CEP1: Top Overlay "19" at 1541.22,5950 h30; Top Overlay "20" at 1539.57,6048.74 h30; Top Overlay "2" at 475,6050 h30; Top Overlay "1" at 475,5950 h30
CEP2: Top Overlay "19" at 3036.22,5945 h30; Top Overlay "20" at 3034.57,6043.74 h30; Top Overlay "2" at 1970,6045 h30; Top Overlay "1" at 1970,5945 h30
HT1: Mechanical 6 "C1" at 2397.5,8451.42 h30 r270
HT2: Mechanical 6 "C1" at 4037.91,8452.06 h30 r270
J1: Top Overlay "0-" at 825,6565 h60; Top Overlay "3+" at 825,6665 h60; Top Overlay "MS" at 825,6770 h60; Top Overlay "DO" at 1115,6575 h60; Top Overlay "DI" at 1125,6670 h60; Top Overlay "CK" at 1120,6770 h60
J4: Mechanical 6 "9" at 907.82,8714.17 h30 r270; Mechanical 6 "8" at 807.82,8764.17 h30 r270; Mechanical 6 "6" at 807.82,8864.17 h30 r270; Mechanical 6 "5" at 907.82,8914.17 h30 r270; Mechanical 6 "7" at 907.82,8814.17 h30 r270; Mechanical 6 "4" at 807.82,8964.17 h30 r270; Mechanical 6 "3" at 907.82,9014.17 h30 r270; Mechanical 6 "2" at 807.82,9064.17 h30 r270; Mechanical 6 "16" at 665.3,8584.25 h30 r270; Mechanical 6 "13" at 352.3,8728.35 h30 r270; Mechanical 6 "10" at 795.22,8664.17 h30 r270; Mechanical 6 "12" at 352.3,9050 h30 r270; Mechanical 6 "15" at 665.3,9194.09 h30 r270; Mechanical 6 "1" at 907.82,9114.17 h30 r270; Mechanical 6 "14" at 352.3,8628.35 h30 r270; Mechanical 6 "11" at 352.3,9150 h30 r270
U2: Mechanical 6 "1" at 7495.31,6157.24 h30